# Altium PCB PCB1.PcbDoc
Units mm, origin at the board's own origin, x right, y up, seen from the top; angles counter-clockwise.
Board outline 49.12 x 15.75 mm, 2 copper layers (Top Layer, Bottom Layer); 15 components, 13 nets, 48 pads, 6 vias.
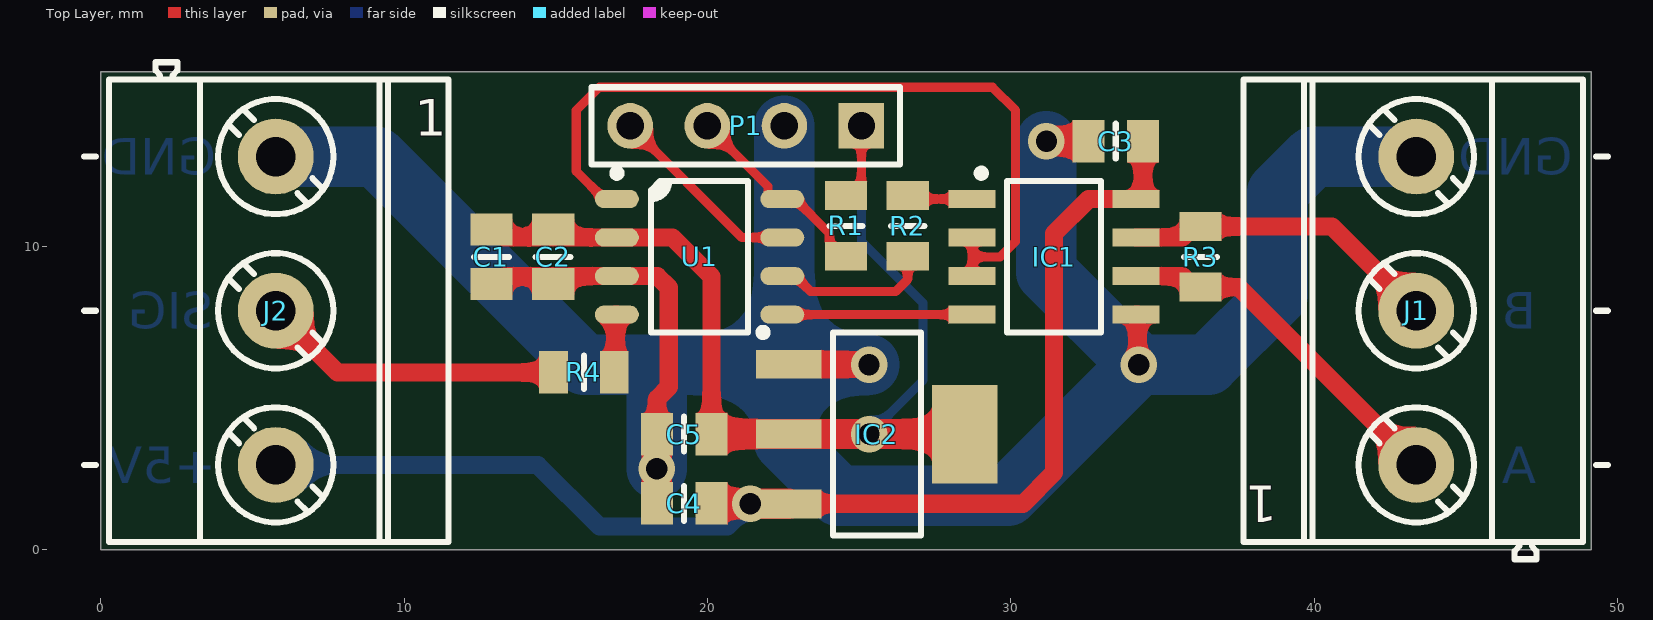
[diagram p0: Top Layer view]
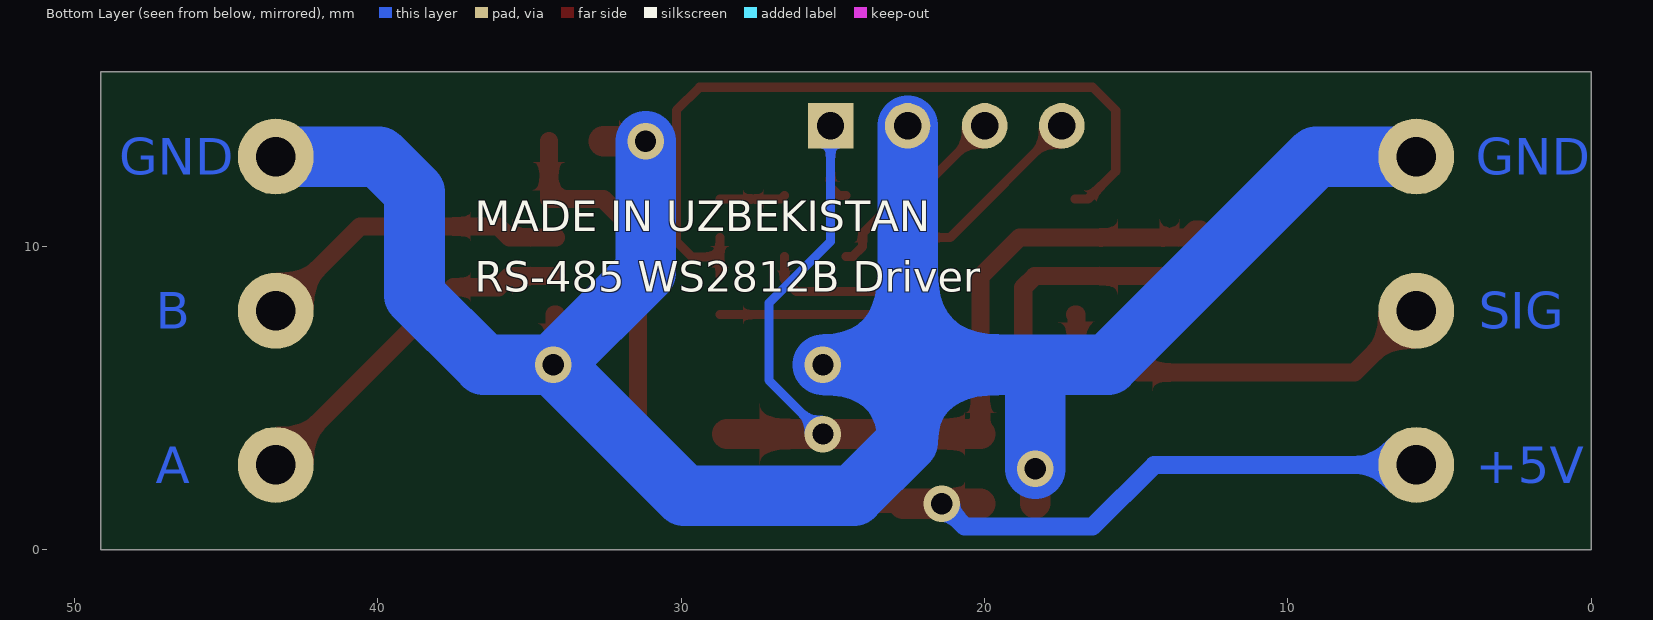
[diagram p1: Bottom Layer view, seen from below]
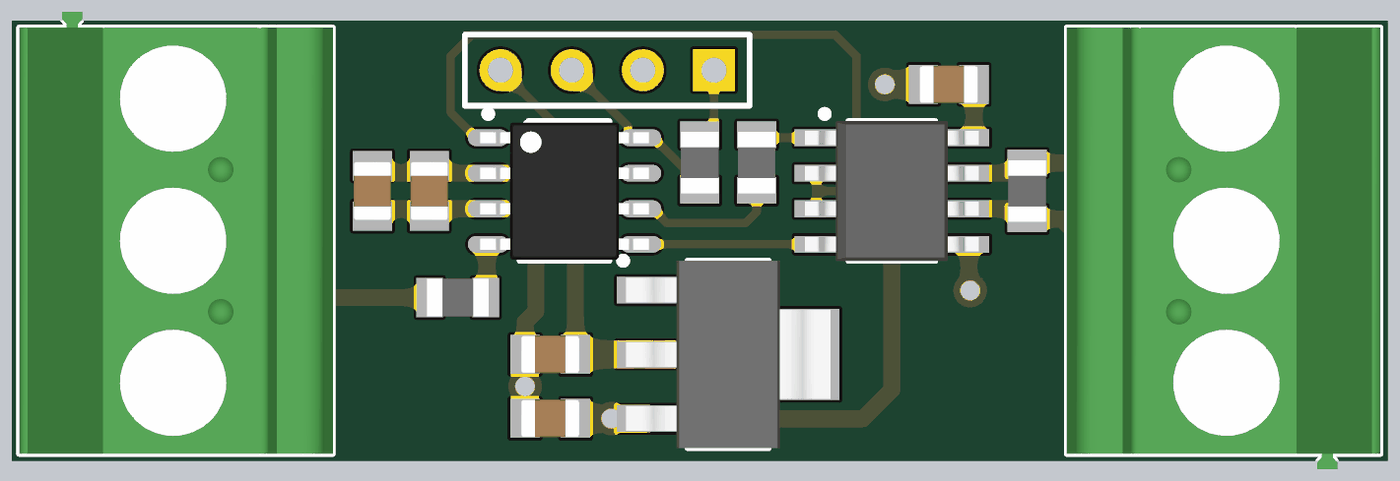
[diagram p2: 3D render of the assembled board from above, using the file's embedded part models]

## Layer stack, top to bottom
Top Solder: solder mask 0.0102, Solder Resist, Dk 3.5
Top Layer: signal copper 0.0356
Dielectric 1: dielectric 0.32, FR-4, Dk 4.8
Bottom Layer: signal copper 0.0356
Bottom Solder: solder mask 0.0102, Solder Resist, Dk 3.5

## Board outline
0,0 49.124,0 49.124,15.748 0,15.748

## Design rules (kind name [scope] priority, off if disabled: settings)
BoardOutlineClearance [All] p1: gap=0.2 ignorepadtopadclearanceinfootprint=FALSE except(0.4: Arc-SplitBarrior Arc-SplitContinuation Track-SplitBarrior Track-SplitContinuation SMDPad-SplitBarrior SMDPad-SplitContinuation THPad-SplitBarrior THPad-SplitContinuation Via-SplitBarrior Via-SplitContinuation Fill-SplitBarrior Fill-SplitContinuation Poly-SplitBarrior Poly-SplitContinuation Region-SplitBarrior Region-SplitContinuation Text-SplitBarrior Text-SplitContinuation)
Clearance "Clearance Bottom Layer" [OnLayer('Bottom Layer')] p1: gap=0.203 ignorepadtopadclearanceinfootprint=TRUE except(0.254: Arc-Text Track-Text SMDPad-Text THPad-Text Via-Text Fill-Text Poly-Text Region-Text Text-Text)
Clearance "Clearance Top Layer" [OnLayer('Top Layer')] p2: gap=0.203 ignorepadtopadclearanceinfootprint=TRUE except(0.254: Arc-Text Track-Text SMDPad-Text THPad-Text Via-Text Fill-Text Poly-Text Region-Text Text-Text)
Clearance [All] p3: gap=0.2 ignorepadtopadclearanceinfootprint=FALSE except(0.089: Arc-Arc Arc-Track Arc-SMDPad Track-Track Track-SMDPad SMDPad-SMDPad; 0.127: Arc-Via Track-Via SMDPad-Via THPad-Via Via-Via; 0.254: Arc-Text Track-Text SMDPad-Text THPad-Text Via-Text Fill-Text Poly-Text Region-Text Text-Text)
HoleSize [All] p1: absolutevalues=TRUE maxlimit=6.3 minlimit=0.2 maxpercent=80.000 minpercent=20.000
MinimumAnnularRing [All] p1: minimumring=0.076
MinimumSolderMaskSliver [All] p1: minsoldermaskwidth=0.1
PolygonConnect PolygonConnect_1 [All] p1: thpad.connectstyle=Relief thpad.reliefconductorwidth=0.508 thpad.reliefentries=4 thpad.polygonreliefangle="90 Angle" thpad.airgapwidth=0.254 smdpad.connectstyle=Relief smdpad.reliefconductorwidth=0.508 smdpad.reliefentries=4 smdpad.polygonreliefangle="90 Angle" smdpad.airgapwidth=0.254 via.connectstyle=Direct via.reliefconductorwidth=0.508 via.reliefentries=4 via.polygonreliefangle="90 Angle" via.airgapwidth=0.254
RoutingCorners [All] p1: cornerstyle=Round minsetback=2.54 maxsetback=2.54
RoutingVias [All] p1: holewidth=0.5 width=1 viastyle="Through Hole" minholewidth=0.2 minwidth=0.45 maxholewidth=1 maxwidth=2
SilkToSilkClearance [All] p1: silktosilkclearance=0.1
SilkToSolderMaskClearance [IsPad] p1: minsilkscreentomaskgap=0.1 clearancetoexposedcopper=TRUE
SolderMaskExpansion [All] p1: expansion=0.102 istentingtop=FALSE
Width [All] p1: maxlimit=2.54 minlimit=0.089 preferedwidth=0.381
25 further rules are at their usual default settings.

## Components (designator, comment, footprint, x,y, rotation, side; value= is the part's Value field where it differs from the comment)
C1 "4.7uF" CAPC2012X135N 12.878,9.652 r90 top
C2 "100nF" CAPC2012X135N 14.91,9.652 r90 top
C3 "100nF" CAPC2012X135N 33.452,13.462 r180 top
C4 "100nF" CAPC2012X135N 19.228,1.524 r0 top
C5 "100nF" CAPC2012X135N 19.228,3.81 r0 top
IC1 "SN65HVD20D" SOIC127P600X175-8N 31.42,9.652 r0 top
IC2 "LM1117 3.3V" SOT230P700X180-4N 25.578,3.81 r0 top
J1 "" PHOENIX_1707917 43.358,7.874 r90 top
J2 "" PHOENIX_1707917 5.766,7.874 r270 top
P1 "Header 4" HDR1X4 25.07,13.97 r180 top
R1 "4k7" RESC2012X60N 24.562,10.668 r90 top
R2 "200" RESC2012X60N 26.594,10.668 r90 top
R3 "200" RESC2012X60N 36.246,9.652 r270 top
R4 "200" RESC2012X60N 15.926,5.842 r0 top
U1 "STM32G031" "ST SOIC-8N" 19.736,9.652 r0 top

## Footprints (in the part's own frame and the unit in brackets; to place one, negate y for a bottom-side part, rotate by r counter-clockwise, add the part's x,y. Pads: shape width x height; smd on the part's side, far side on the other; paste and mask are expansions set on the pad)
CAPC2012X135N [mm] "Chip Capacitor, Body 2.0x1.25mm, IPC Medium Density"
  rect 1.05x1.4 smd: 1(-0.9,0) 2(0.9,0)
  silkscreen extent 0,-0.58 0,0.58, body extent -1.05,-0.67 1.05,0.68, height 1.25
HDR1X4 [mm] "Connector; Header; 4 Position"
  rect 1.5x1.5 hole 0.9: 1(0,0)
  round 1.5 hole 0.9: 2(2.54,0) 3(5.08,0) 4(7.62,0)
  silkscreen extent -1.27,-1.27 8.89,1.27
PHOENIX_1707917 [mm] "PHOENIX MKDS Serie, Pitch 5.08mm, 24A, 400V, 3 Positions Header"
  round 2.5 hole 1.3: 1(-5.08,0) 2(0,0) 3(5.08,0)
  silkscreen extent -8.19,-6.31 7.62,5.7, body extent -8.19,-5.5 7.62,5.7, height 18.29
RESC2012X60N [mm] "Chip Resistor, EIA 0805, Metric 2012, Body 2.0x1.2mm, IPC Medium Density"
  rect 0.95x1.4 smd: 1(-1,0) 2(1,0)
  silkscreen extent 0,-0.55 0,0.55, body extent -1.1,-0.67 1.1,0.68, height 0.6
SOIC127P600X175-8N [mm] "SOIC 8, Pitch 1.27mm - Body 4x5mm, IPC Medium Density"
  rect 1.55x0.6 smd: 1(-2.7,1.905) 2(-2.7,0.635) 3(-2.7,-0.635) 4(-2.7,-1.905) 5(2.7,-1.905) 6(2.7,-0.635) 7(2.7,0.635) 8(2.7,1.905)
  silkscreen extent -2.52,-2.5 1.55,2.88, body extent -3.1,-2.5 3.1,2.5, height 1.75
SOT230P700X180-4N [mm] "SOT223, 2.30mm pitch; 3 pin, 3.70mm W X 6.70mm L, IPC Medium Density"
  rect 2.15x0.95 smd: 1(-2.9,2.3) 2(-2.9,0) 3(-2.9,-2.3)
  rect 2.15x3.25 smd: 4(2.9,0)
  silkscreen extent -3.87,-3.35 1.45,3.47, body extent -3.65,-3.35 3.65,3.35, height 1.81
"ST SOIC-8N" [mm] "SOIC, 8-Leads, Body 4.90x3.90mm, Pitch 1.27mm, IPC Medium Density"
  oval 1.45x0.6 smd: 1(-2.725,1.905) 2(-2.725,0.635) 3(-2.725,-0.635) 4(-2.725,-1.905) 5(2.725,-1.905) 6(2.725,-0.635) 7(2.725,0.635) 8(2.725,1.905)
  silkscreen extent -2.85,-2.5 1.6,2.88, body extent -3.01,-2.45 3.01,2.45, height 1.5

## Part data
C1: library part CC0805_4.7UF_16V_10%_X7R, "Non-polarised capacitor", Case=0805, Manufacturer=GENERIC, Manufacturer1 ComponentHeight=1.35mm, Manufacturer1 Example="TAIYO YUDEN", Manufacturer1 Part Number=EMK212B7475KG-T, Tolerance=±10%, Voltage=16V, Author="CERN DEM JLC", Component Type=Standard, CreateDate=16.09.2014, HelpURL=\\cern.ch\dfs\Applications\Altium\Datasheets\CC0805_X7R_TAIYO-YUDEN_HIGH-VALUE.pdf, LatestRevisionDate=16.09.2014, Manufacturer Part Number=CC0805_4.7UF_16V_10%_X7R, Mounted=Yes, Part Description="SMD Multilayer Chip Ceramic Capacitor", Part Number=CC0805_4.7UF_16V_10%_X7R, Pin Count=2, Sense=No, SMD=Yes, Socket=No, Status=Preferred, TC=X7R
C2 C3 C4 C5: library part CC0805_100NF_50V_10%_X7R, "Non-polarised capacitor", Case=0805, Manufacturer=GENERIC, Manufacturer1 ComponentHeight=1mm, Manufacturer1 Example=TDK, Manufacturer1 Part Number=C2012X7R1H104K085AA, Tolerance=±10%, Voltage=50V, Author="CERN DEM JLC", Component Type=Standard, CreateDate=03.12.2007, HelpURL=\\cern.ch\dfs\Applications\Altium\Datasheets\CC0805_X7R_TDK_C.pdf, LatestRevisionDate=22.04.2015, Manufacturer Part Number=CC0805_100NF_50V_10%_X7R, Mounted=Yes, Part Description="SMD Multilayer Chip Ceramic Capacitor", Part Number=CC0805_100NF_50V_10%_X7R, Pin Count=2, Sense=No, SMD=Yes, Socket=No, Status=Preferred, TC=X7R
IC1: "Extended Common-Mode RS-485 Transceiver", Case=SOIC8, Manufacturer="TEXAS INSTRUMENTS", Author="CERN DEM JLC", Bonding=No, Component Type=Standard, ComponentHeight=1.75mm, CreateDate=29.10.2013, Device=SN65HVD20D, HelpURL=\\cern.ch\dfs\Applications\Altium\Datasheets\SN65HVD20D.pdf, LatestRevisionDate=29.10.2013, Manufacturer Part Number=SN65HVD20D, Mounted=Yes, PackageDescription="SOIC 8, Pitch 1.27mm - Body 4x5mm, IPC Medium Density", Part Description="25Mbps Extended Common-Mode RS-485 Transceiver", Part Number=SN65HVD20D, Pin Count=8, PressFit=No, Sense=No, SMD=Yes, Socket=No
IC2: library part LM1117MP-1.8/NOPB, "3-Terminal Regulator 1=GND 2=OUT 3=IN 4=OUT", Case=SOT223, Manufacturer="TEXAS INSTRUMENTS", Author="CERN DEM JLC", Bonding=No, Component Type=Standard, ComponentHeight=1.8mm, CreateDate=18.01.2011, Device=LM1117MP-1.8/NOPB, HelpURL=\\cern.ch\dfs\Applications\Altium\Datasheets\LM1117MP-1.8-NOPB.pdf, LatestRevisionDate=16.09.2014, Manufacturer Part Number=LM1117MP-1.8/NOPB, Mounted=Yes, PackageDescription="SOT223, 2.30mm pitch; 3 pin, 3.70mm W X 6.70mm L, IPC Medium Density", Part Description="1.8V 800mA Low-Dropout Linear Regulator", Part Number=LM1117MP-1.8/NOPB, Pin Count=4, PressFit=No, Sense=No, SMD=Yes, Socket=No
J1 J2: library part PHOENIX_1707917, "Terminal Block, 3 Positions, Screw Connection", Manufacturer="PHOENIX CONTACT", Manufacturer Part Number="1707917 (MKDS 3/ 3-B-5,08)", Author="CERN DEM JLC", Component Type=Standard, ComponentHeight=18mm, CreateDate=04.12.2013, HelpURL=\\cern.ch\dfs\Applications\Altium\Datasheets\PHOENIX_1707917.pdf, LatestRevisionDate=04.12.2013, Mounted=Yes, Part Description="24A, 400V, Terminal Block, Pitch 5.08mm, 3 Positions, Screw Connection", Part Number=PHOENIX_1707917, Pin Count=3, PressFit=No, Sense=No, SMD=No, Socket=No, Status=None
P1: "Header, 4-Pin", LatestRevisionDate=17-Jul-2002, LatestRevisionNote="Re-released for DXP Platform.", Publisher="Altium Limited"
R1: library part R0805_4K7_1%_0.125W_100PPM, "Resistor - 1%", Case=0805, Manufacturer=GENERIC, Manufacturer1 ComponentHeight=0.6mm, Manufacturer1 Example="NIC COMPONENT", Manufacturer1 Part Number=NRC10F4701TRF, Power=0.125W, Tolerance=±1%, Author="CERN DEM JLC", Component Type=Standard, CreateDate=03.12.2007, HelpURL=\\cern.ch\dfs\Applications\Altium\Datasheets\R0805_NIC_NRC.pdf, LatestRevisionDate=13.03.2008, Manufacturer Part Number=R0805_4K7_1%_0.125W_100PPM, Mounted=Yes, Part Description="General Purpose Thick Film Chip Resistor", Part Number=R0805_4K7_1%_0.125W_100PPM, Pin Count=2, PressFit=No, Sense=No, SMD=Yes, Socket=No, Status=Preferred, TC=±100ppm/°C
R2 R3 R4: library part R0805_200R_1%_0.125W_100PPM, "Resistor - 1%", Case=0805, Manufacturer=GENERIC, Manufacturer1 ComponentHeight=0.6mm, Manufacturer1 Example="NIC COMPONENT", Manufacturer1 Part Number=NRC10F2000TRF, Power=0.125W, Tolerance=±1%, Author="CERN DEM JLC", Component Type=Standard, CreateDate=03.12.2007, HelpURL=\\cern.ch\dfs\Applications\Altium\Datasheets\R0805_NIC_NRC.pdf, LatestRevisionDate=13.03.2008, Manufacturer Part Number=R0805_200R_1%_0.125W_100PPM, Mounted=Yes, Part Description="General Purpose Thick Film Chip Resistor", Part Number=R0805_200R_1%_0.125W_100PPM, Pin Count=2, PressFit=No, Sense=No, SMD=Yes, Socket=No, Status=Preferred, TC=±100ppm/°C

## Via types
v1: diameter 1.2, hole 0.7, Top Layer to Bottom Layer, 6 vias

## Nets (pads, with @x,y where several pads share a name; then routed paths per layer and width w, separated by ;. In a path a pad name is that pad's centre, name@x,y a point inside that pad or via, vN(x,y) a via of type N, cw(c..) or ccw(c..) an arc to the next point about the centre after c; other vN are vias at no path point)
+3.3V: C1.2 C2.2 C5.2 IC2.2 IC2.4 P1.1 R1.2 U1.2 | length 35.8
  Top Layer w0.3: R1.2 24.787,11.668 25.07,11.951 P1.1
  Top Layer w0.6: C1.2 13.053,10.552 13.318,10.287 U1.2 18.847,10.287 20.128,9.006 C5.2
  Top Layer w1: C5.2 IC2.2 v1(25.324,3.81) IC2.4
  Bottom Layer w0.3: P1.1 25.07,10.16 27.102,8.128 27.102,5.588 v1(25.324,3.81)
+5: C3.1 C4.2 IC1.8 IC2.3 J2.3 | length 41.7
  Top Layer w0.6: C4.2 C4.2@20.135,1.517 ; IC2.3@22.671,1.517 IC2.3 30.39,1.51 31.42,2.54 31.42,10.414 32.563,11.557 IC1.8 34.352,11.557 C3.1
  Top Layer w1: C4.2@20.135,1.517 v1(21.403,1.517) IC2.3@22.671,1.517
  Bottom Layer w0.6: J2.3 14.402,2.794 16.434,0.762 20.648,0.762 v1(21.403,1.517)
GND: C1.1 C2.1 C3.2 C4.1 C5.1 IC1.5 IC2.1 J1.3 J2.1 P1.2 U1.3 | length 92.3
  Top Layer w0.6: C1.1 13.053,8.752 13.318,9.017 U1.3 18.339,9.017 18.72,8.636 18.72,5.364 18.328,4.972 C5.1 ; IC2.1 IC2.1@22.685,6.103 ; v1@25.317,6.103 v1(25.324,6.096) ; IC1.5 34.167,7.747 34.167,6.143 v1(34.214,6.096)
  Top Layer w0.9: IC2.1@22.685,6.103 v1@25.317,6.103
  Top Layer w1: C4.1 v1(18.328,2.667) C5.1 ; v1(31.166,13.462) C3.2
  Bottom Layer w1: 18.328,5.958 18.466,6.096
  Bottom Layer w2: J2.1 9.068,12.954 15.926,6.096 18.466,6.096 22.53,6.096 ; v1(18.328,2.667) 18.328,5.958 ; P1.2 22.53,6.096 ; v1(25.324,6.096) 22.53,6.096 ; v1(31.166,13.462) 31.166,9.144 v1(34.214,6.096) ; J1.3 39.957,12.954 38.786,11.782 38.786,8.382 36.5,6.096 v1(34.214,6.096) ; 22.53,6.096 22.53,3.556 24.308,1.778 29.896,1.778 v1(34.214,6.096)
NetIC1_1: IC1.1 R2.2 | length 2.2
  Top Layer w0.3: R2.2 26.705,11.557 IC1.1
NetIC1_2: IC1.2 IC1.3 U1.1 | length 26.1
  Top Layer w0.3: U1.1 16.586,11.557 15.672,12.471 15.672,14.478 16.434,15.24 29.388,15.24 30.15,14.478 30.15,10.16 29.642,9.652 28.72,9.652 ; IC1.3 28.72,9.652 ; IC1.2 28.72,9.652
NetIC1_4: IC1.4 U1.5 | length 6.3
  Top Layer w0.3: U1.5 IC1.4
NetIC1_6: IC1.6 J1.1 R3.2 | length 11.8
  Top Layer w0.6: IC1.6 35.656,9.017 36.021,8.652 37.5,8.652 J1.1
NetIC1_7: IC1.7 J1.2 R3.1 | length 10.5
  Top Layer w0.6: IC1.7 35.656,10.287 36.021,10.652 R3.1 40.58,10.652 J1.2
NetJ2_2: J2.2 R4.1 | length 10
  Top Layer w0.6: J2.2 7.798,5.842 R4.1
NetP1_3: P1.3 R1.1 U1.8 | length 6.8
  Top Layer w0.3: P1.3 21.989,11.971 21.989,11.696 22.128,11.557 U1.8 22.886,11.557 24.012,10.431 24.012,9.993 24.337,9.668 R1.1
NetP1_4: P1.4 U1.7 | length 6.5
  Top Layer w0.3: P1.4 21.133,10.287 U1.7
NetR2_1: R2.1 U1.6 | length 5.3
  Top Layer w0.3: U1.6 22.886,9.017 23.394,8.509 26.2,8.509 26.594,8.903 R2.1
NetR4_2: R4.2 U1.4 | length 2
  Top Layer w0.6: R4.2 16.968,5.884 16.968,7.747 U1.4

## Other copper
Bottom Layer:
  text "GND" at 3.809,12.354 h1.2
  text "GND" at 48.513,12.354 h1.2
  text "SIG" at 3.709,7.274 h1.2
  text "B" at 47.314,7.274 h1.2
  text "+5V" at 3.809,2.194 h1.2
  text "A" at 47.314,2.194 h1.2

## Silkscreen, mask and mechanical layers (free items; w line width, h text height)
Bottom Overlay:
  text "MADE IN UZBEKISTAN" at 36.8,10.5 h1
  text "RS-485 WS2812B Driver" at 36.8,8.5 h1
Mechanical 18:
  the board outline again, w0.2

## Text inside footprints (layer, text, board x,y; h text height)
J1: Top Overlay "1" at 38.783,2.099 h1.2 r180; Mechanical 14 "1" at 38.783,2.099 h1.2 r180
J2: Top Overlay "1" at 10.341,13.649 h1.2; Mechanical 14 "1" at 10.341,13.649 h1.2